# Altium PCB EGS8030带驱动.PcbDoc
Units mil, origin at the board's own origin, x right, y up, seen from the top; angles counter-clockwise.
Board outline 4085.03 x 2765.03 mil, 2 copper layers (Top Layer, Bottom Layer); 75 components, 74 nets, 270 pads, 0 vias.
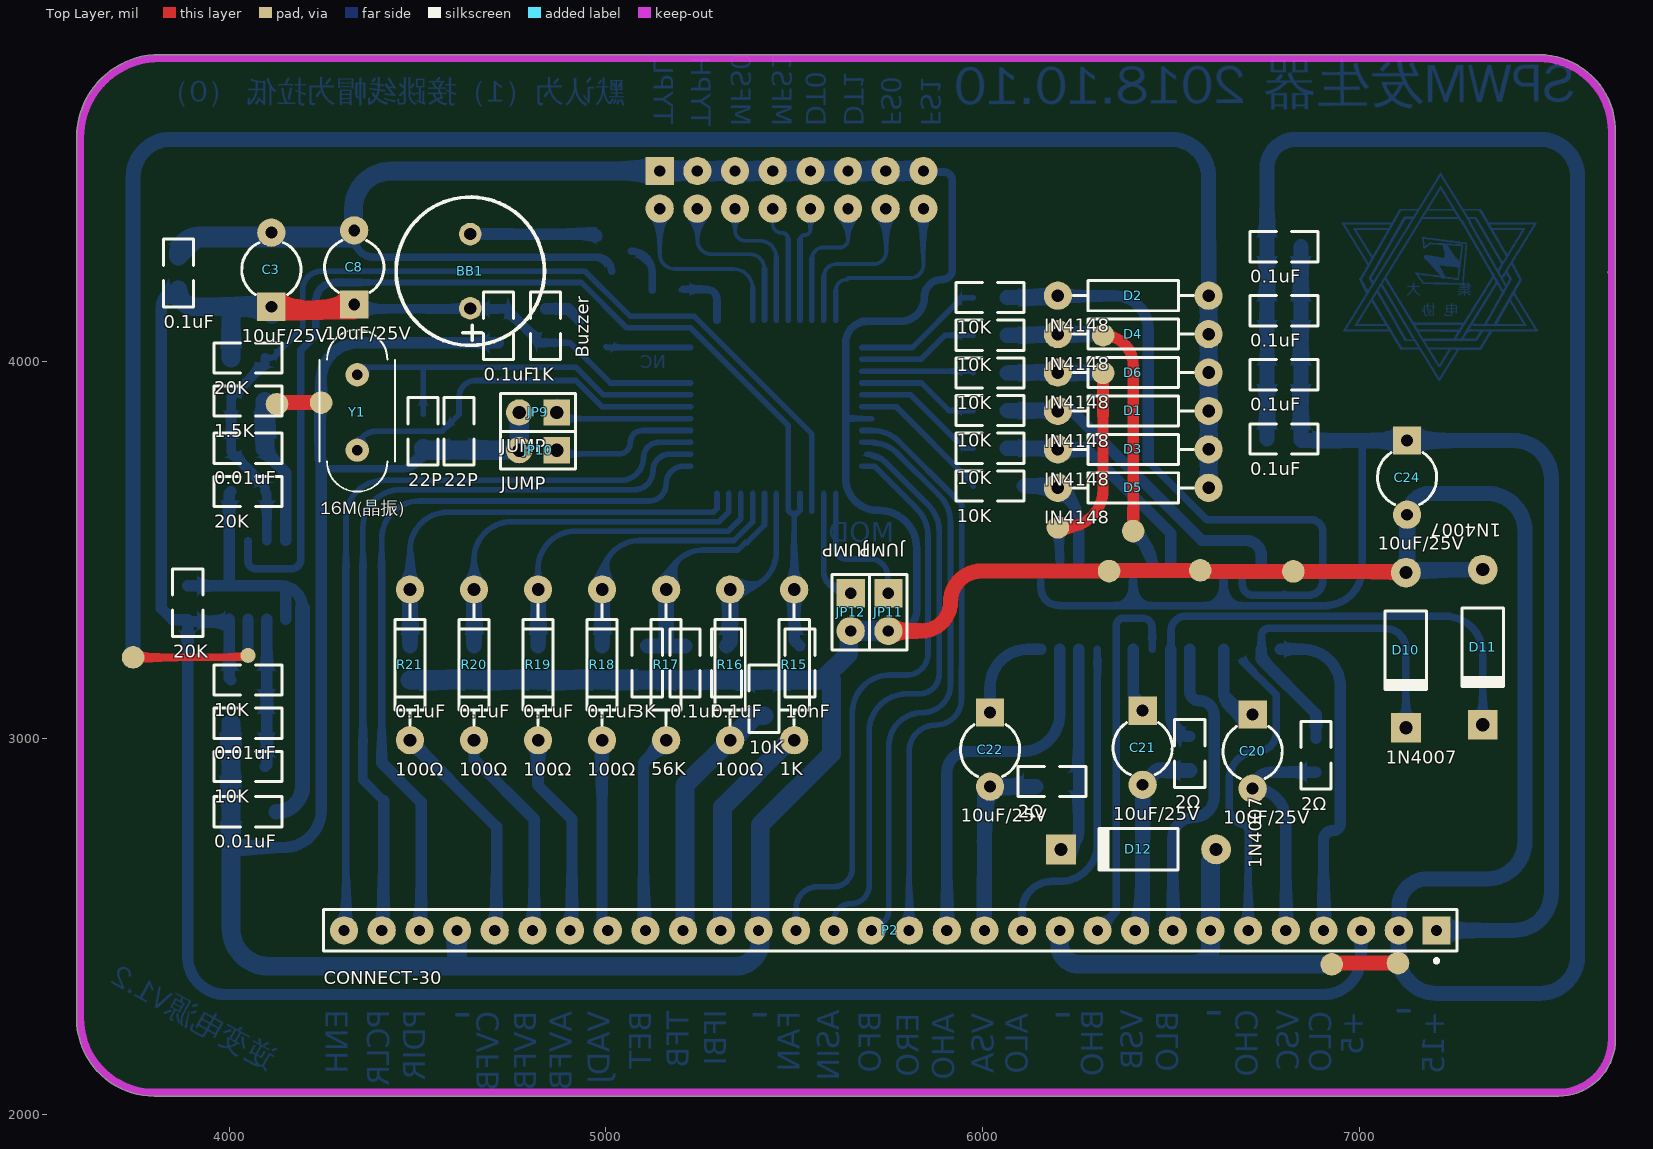
[diagram p0: Top Layer view]
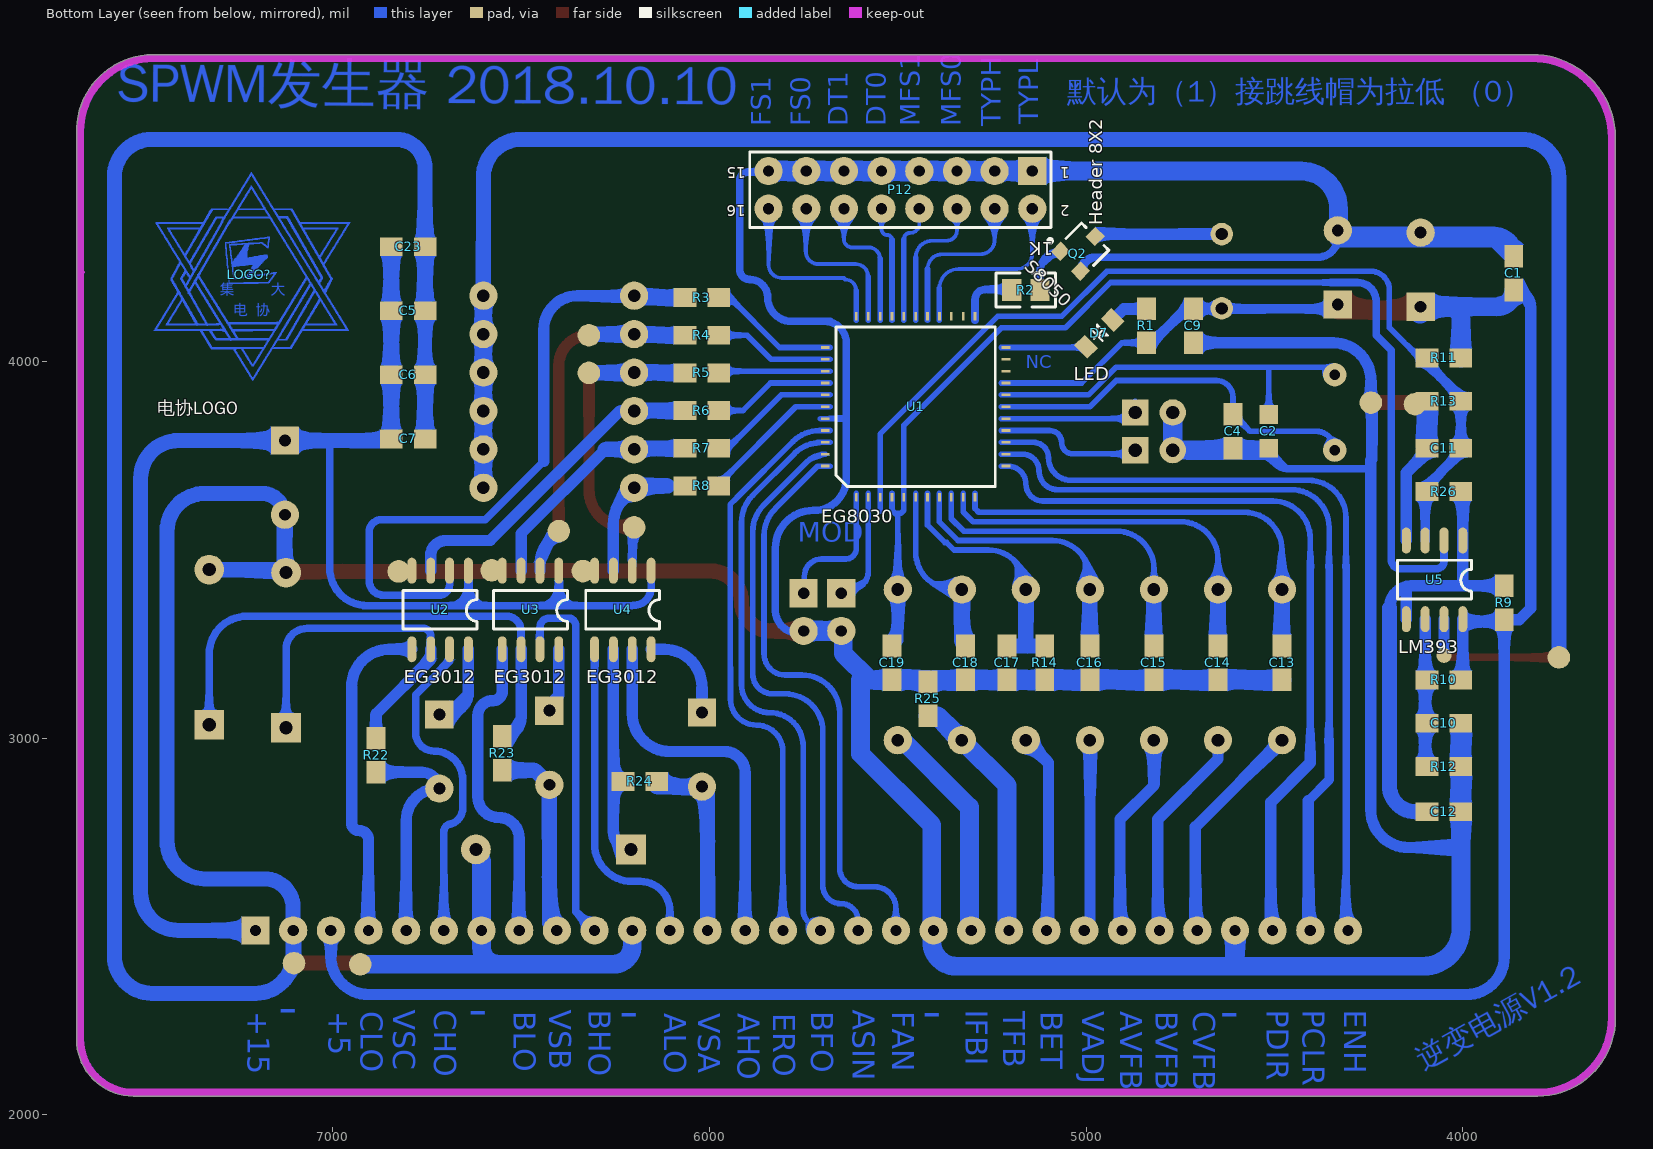
[diagram p1: Bottom Layer view, seen from below]

## Layer stack, top to bottom
Top Solder: solder mask 0.4, Solder Resist, Dk 3.5
Top Layer: signal copper 1.4
Dielectric 1: dielectric 12.6, FR-4, Dk 4.8
Bottom Layer: signal copper 1.4
Bottom Solder: solder mask 0.4, Solder Resist, Dk 3.5

## Board outline
3594.99,2256.3 3594.99,4597 cw(c3605,4597) 3595,4597.54 cw(c3815,4595) 3815,4815.02 7477,4815.02 cw(c7477,4805) 7477.59,4815 cw(c7478.11,4805) 7478.17,4815.01 cw(c7477,4612) 7679.82,4620.99 cw(c7670,4619) 7680.02,4619 7680.02,2201 cw(c7529,2201) 7529,2049.99 3801.3,2049.99 cw(c3801.3,2256.3)

## Design rules (kind name [scope] priority, off if disabled: settings)
Clearance [All] p1: gap=8
ComponentClearance [All] p1: gap=0 collisioncheckmode=3 verticalgap=0 showdistances=FALSE
PolygonConnect [All] p1: connectstyle=Relief reliefconductorwidth=10 reliefentries=4 polygonreliefangle="90 Angle" airgapwidth=10
RoutingVias [All] p1: holewidth=28 width=50 viastyle="Through Hole" minholewidth=28 minwidth=50 maxholewidth=28 maxwidth=50
SolderMaskExpansion [All] p1: expansion=4
Width [All] p1: maxlimit=60 minlimit=10 preferedwidth=10 toplayer_maxwidth=50 minimp=50.000000 maximp=50.000000 favimp=50.000000
29 further rules are at their usual default settings.

## Components (designator, comment, footprint, x,y, rotation, side; value= is the part's Value field where it differs from the comment)
BB1 "Buzzer" Buzzer 4640,4240 r90 top
C1 "0.1uF" 0805#1 3860,4220 r270 top
C2 "22P" 0805#2 4510,3800 r270 top
C3 "10uF/25V" CAPR5-4X5 4112,4244 r90 top
C4 "22P" 0805#1 4605,3800 r270 top
C5 "0.1uF" 0805#1 6815,4130 r0 top
C6 "0.1uF" 0805#1 6815,3960 r0 top
C7 "0.1uF" 0805#1 6815,3790 r0 top
C8 "10uF/25V" CAPR5-4X5 4332,4250 r90 top
C9 "0.1uF" 0805#1 4720,4110 r90 top
C10 "0.01uF" 0805#1 4065,3035 r0 top
C11 "0.01uF" 0805#1 4035,3775 r180 top
C12 "0.01uF" 0805#1 4065,2800 r0 top
C13 "0.1uF" 0805#1 4485,3215 r90 top
C14 "0.1uF" 0805#1 4655,3215 r90 top
C15 "0.1uF" 0805#1 4825,3215 r90 top
C16 "0.1uF" 0805#1 4995,3215 r90 top
C17 "0.1uF" 0805#1 5215,3215 r90 top
C18 "0.1uF" 0805#1 5325,3215 r90 top
C19 "10nF" 0805#1 5520,3215 r90 top
C20 "10uF/25V" CAPR5-4X5 6717,2965 r270 top
C21 "10uF/25V" CAPR5-4X5 6425,2975 r270 top
C22 "10uF/25V" CAPR5-4X5 6020,2970 r270 top
C23 "0.1uF" 0805#1 6815,4300 r0 top
C24 "10uF/25V" CAPR5-4X5 7127,3692 r270 top
D1 "IN4148" AXIAL-0.4 6400,3869 r0 top
D2 "IN4148" AXIAL-0.4 6400,4175 r0 top
D3 "IN4148" AXIAL-0.4 6400,3767 r0 top
D4 "IN4148" AXIAL-0.4 6400,4073 r0 top
D5 "IN4148" AXIAL-0.4 6400,3665 r0 top
D6 "IN4148" AXIAL-0.4 6400,3971 r0 top
D7 "LED" LED(0805) 4965,4075 r315 bottom
D10 "1N4007" DO-41 7124,3234 r270 top
D11 "1N4007" DO-41 7328,3242 r270 top
D12 "1N4007" DO-41 6414,2705 r180 top
JP9 "JUMP" HDR1X2#1 4870,3865 r180 top
JP10 "JUMP" HDR1X2#1 4870,3765 r180 top
JP11 "JUMP" HDR1X2#2 5750,3385 r270 top
JP12 "JUMP" HDR1X2#2 5650,3385 r270 top
LOGO? "电协LOGO" 电协LOGO 7222,4230.94 r180 bottom
P2 "CONNECT-30" HDR1X30 7205,2490 r180 top
P12 "Header 8X2" HDR2X8 5143,4506 r0 bottom
Q2 "S8050" NPN 5015,4240 r225 bottom
R1 "1K" 0805#1 4845,4110 r90 top
R2 "1K" 0805#3 5160,4190 r0 bottom
R3 "10K" 0805#1 6035,4165 r0 top
R4 "10K" 0805#1 6035,4065 r0 top
R5 "10K" 0805#1 6035,3965 r0 top
R6 "10K" 0805#1 6035,3865 r0 top
R7 "10K" 0805#1 6035,3765 r0 top
R8 "10K" 0805#1 6035,3665 r0 top
R9 "20K" 0805#1 3895,3375 r90 top
R10 "10K" 0805#1 4065,3150 r0 top
R11 "20K" 0805#1 4065,4005 r0 top
R12 "10K" 0805#1 4035,2930 r180 top
R13 "1.5K" 0805#1 4065,3890 r0 top
R14 "3K" 0805#1 5105,3185 r270 top
R15 "1K" AXIAL-0.4 5500,3195 r270 top
R16 "100Ω" AXIAL-0.4 5330,3195 r270 top
R17 "56K" AXIAL-0.4 5160,3195 r270 top
R18 "100Ω" AXIAL-0.4 4990,3195 r270 top
R19 "100Ω" AXIAL-0.4 4820,3195 r270 top
R20 "100Ω" AXIAL-0.4 4650,3195 r270 top
R21 "100Ω" AXIAL-0.4 4480,3195 r270 top
R22 "2Ω" 0805#1 6890,2970 r90 top
R23 "2Ω" 0805#1 6555,2975 r90 top
R24 "2Ω" 0805#1 6199.5,2880.48 r0 top
R25 "10K" 0805#1 5415,3090 r270 top
R26 "20K" 0805#1 4065,3650 r0 top
U1 "EG8030" EG8030 5554.96,3965 r180 bottom locked
U2 "EG3012" SOIC-8(TPS7333/50) 6615,3480 r270 bottom
U3 "EG3012" SOIC-8(TPS7333/50) 6375,3480 r270 bottom
U4 "EG3012" SOIC-8(TPS7333/50) 6130,3480 r270 bottom
U5 "LM393" SOIC-8(TPS7333/50) 3975,3560 r270 bottom
Y1 "16M(晶振)" 22M(晶振) 4340,3765 r90 top

## Footprints (in the part's own frame and the unit in brackets; to place one, negate y for a bottom-side part, rotate by r counter-clockwise, add the part's x,y. Pads: shape width x height; smd on the part's side, far side on the other; paste and mask are expansions set on the pad)
22M(晶振) [mil]
  round 62 hole 28: 1(0,0) 2(200,0)
  silkscreen extent -110,-100 320,100, body extent -114,-102 326,82, height 143
0805#1 [mil]
  rect 60x50 smd far side: 1(-60,5) 2(30,5)
  silkscreen extent -105,-35 75,45
0805#2 [mil]
  rect 50x50 smd far side: 1(-60,5) 2(30,5)
  silkscreen extent -105,-35 75,45
0805#3 [mil]
  rect 51.18x59.06 smd: 1(-37.4,0) 2(37.4,0)
  silkscreen extent -79,-45 79,45, body extent -39,-25 39,25, height 22
AXIAL-0.4 [mm] "Axial Device, Thru-Hole; 2 Leads; 0.4 in Pin Spacing"
  round 1.905 hole 0.85: 1(-5.08,0) 2(5.08,0)
  silkscreen extent -4.06,-1.02 4.06,1.02
Buzzer [mil]
  round 60 hole 32 mask+0: 1(-98.43,0) 2(98.43,0)
  silkscreen extent -197,-197 197,197, body extent -240,-236 233,236, height 354
CAPR5-4X5 [mm] "Capacitor; 2 Leads"
  rect 1.905x1.905 hole 0.8: 1(-2.5,0)
  round 1.905 hole 0.8: 2(2.5,0)
  silkscreen extent -1.69,-2 1.82,2
DO-41 [mm] "Diode, Axial; Body 5.2 x 2.7 mm (LxDia. max), Lead Dia. 0.86 mm (max)"
  round 2 hole 0.889: 1(-5.23,0)
  rect 2x2 hole 0.889: 2(5.23,0)
  silkscreen extent -2.65,-1.4 2.75,1.4
EG8030 [mm]
  oval 0.18x0.6 smd: 1(-1.397,-8.255)
  rect 0.18x0.6 smd: 2(-0.597,-8.255) 3(0.203,-8.255) 4(1.003,-8.255) 5(1.803,-8.255) 6(2.603,-8.255) 7(3.403,-8.255) 8(4.203,-8.255) 9(5.003,-8.255) 10(5.803,-8.255) 11(6.603,-8.255) 23(6.603,3.945) 24(5.803,3.945) 25(5.003,3.945) 26(4.203,3.945) 27(3.403,3.945) 28(2.603,3.945) 29(1.803,3.945) 30(1.003,3.945) 31(0.203,3.945) 32(-0.597,3.945) 33(-1.397,3.945)
  rect 0.6x0.18 smd: 12(8.703,-6.155) 13(8.703,-5.355) 14(8.703,-4.555) 15(8.703,-3.755) 16(8.703,-2.955) 17(8.703,-2.155) 18(8.703,-1.355) 19(8.703,-0.555) 20(8.703,0.245) 21(8.703,1.045) 22(8.703,1.845) 34(-3.497,1.845) 35(-3.497,1.045) 36(-3.497,0.245) 37(-3.497,-0.555) 38(-3.497,-1.355) 39(-3.497,-2.155) 40(-3.497,-2.955) 41(-3.497,-3.755) 42(-3.497,-4.555) 43(-3.497,-5.355) 44(-3.497,-6.155)
  silkscreen extent -2.76,-7.52 7.97,3.21
HDR1X2#1 [mil] "Connector; Header; 2 Position"
  rect 70x70 hole 35.43: 1(0,0)
  round 70 hole 35.43: 2(100,0)
  silkscreen extent -50,-50 150,50
HDR1X2#2 [mil] "Connector; Header; 2 Position"
  rect 75x75 hole 30: 1(0,0)
  round 75 hole 30: 2(100,0)
  silkscreen extent -50,-50 150,50
HDR1X30 [mil] "Connector; Header; 30 Position"
  rect 75x75 hole 30: 1(0,0)
  round 75 hole 30: 2(100,0) 3(200,0) 4(300,0) 5(400,0) 6(500,0) 7(600,0) 8(700,0) 9(800,0) 10(900,0) 11(1000,0) 12(1100,0) 13(1200,0) 14(1300,0) 15(1400,0) 16(1500,0) 17(1600,0) 18(1700,0) 19(1800,0) 20(1900,0) 21(2000,0) 22(2100,0) 23(2200,0) 24(2300,0) 25(2400,0) 26(2500,0) 27(2600,0) 28(2700,0) 29(2800,0) 30(2900,0)
  silkscreen extent -55,-55 2955,86
HDR2X8 [mil] "Connector; Header; 8x2 Position"
  rect 75x75 hole 30: 1(0,0)
  round 75 hole 30: 2(0,100) 3(100,0) 4(100,100) 5(200,0) 6(200,100) 7(300,0) 8(300,100) 9(400,0) 10(400,100) 11(500,0) 12(500,100) 13(600,0) 14(600,100) 15(700,0) 16(700,100)
  silkscreen extent -50,-50 750,150
LED(0805) [mil]
  rect 40x50 smd: 1(-50,0) 2(50,0)
  silkscreen extent -20,-20 20,20, body extent -37,-24 43,25, height 43
NPN [mm]
  rect 0.9x0.95 smd: 1(-0.001,0.001) 2(-1.901,0.001) 3(-0.951,2.351)
  silkscreen extent -3.03,-0.12 0.35,2.35, body extent -2.47,-0.21 0.43,2.59, height 1.2
SOIC-8(TPS7333/50) [mm]
  oval 1.75x0.6 smd: 1(0.889,-0.635) 2(0.889,-1.905) 3(0.889,-3.175) 4(0.889,-4.445) 5(6.189,-4.445) 6(6.189,-3.175) 7(6.189,-1.905) 8(6.189,-0.635)
  silkscreen extent 2.22,-5.04 4.83,-0.05
电协LOGO [mil]
  Top Layer drawing of 5309 lines, arcs and shapes, not listed

## Part data
BB1: library part Buzzer(有源蜂鸣器)
C1 C2 C4 C5 C6 C7 C9 C10 C11 C12 C13 C14 C15 C16 C17 C18 C19 C23: library part CAP, "Capacitor"
C3 C8 C20 C21 C22 C24: library part ELECTRO1, "Electrolytic Capacitor"
D1 D2 D3 D4 D5 D6: library part DIODE
D7: library part LED0, "Typical INFRARED GaAs LED"
D10 D11 D12: library part "Diode 1N4007", "1 Amp General Purpose Rectifier"
P12: "Header, 8-Pin, Dual row"
Q2: library part Q2
R1 R2 R3 R4 R5 R6 R7 R8 R9 R10 R11 R12 R13 R14 R15 R16 R17 R18 R19 R20 R21 R22 R23 R24 R25 R26: library part RES2
U1: library part EG8030_1, "3-PH SPWM"
Y1: library part XTAL

## Free pads (board coordinates)
  round 60 all layers, no hole: 2(4127,3887) 2(4244,3891) 2(6200,3560) 3(6336,3444) 3(6400,3550) 3(6578,3446) 3(6825,3443) 3(6927,2400) 3(7103,2403) 4(6320,4070) 5(6320,3970) 6(3745,3215)
  round 40 all layers, no hole: 7(4050,3220)

## Nets (pads, with @x,y where several pads share a name; then routed paths per layer and width w, separated by ;. In a path a pad name is that pad's centre, name@x,y a point inside that pad or via, vN(x,y) a via of type N, cw(c..) or ccw(c..) an arc to the next point about the centre after c; other vN are vias at no path point)
+5V: BB1.1 C1.2 C3.1 C8.1 C9.2 P2.3 R1.1 R9.1 R10.1 R11.1 U1.19 U5.8 | length 7007.5
  Top Layer w50: C3.1 ccw(c4121,4145.57) 4121,4136.57 C8.1@4330,4136.57
  Bottom Layer w15: R1.1 4905,4050 5011.85,3943.15 5225,3943.15
  Bottom Layer w25: C8.1@4330,4136.57 4333.43,4140 C9.2 4735,4140 4825,4050 R1.1
  Bottom Layer w30: C1.2 ccw(c3865,4145) 3820,4145 3820,3345 3850,3315 R9.1 3890,2420 ccw(c3990,2420) 3990,2320 6905,2320 ccw(c6905,2420) 7005,2420 P2.3 ; R9.1@3905,3310 3993.66,3310 U5.8 4000,3160 R10.1 ; 4005,4111.57 4020,4126.57
  Bottom Layer w50: C1.2 ccw(c3909.43,4190) 3909.43,4145.57 C3.1 ; R11.1 4005,4111.57 ; C3.1@4112,4126.57 C3.1@4115,4126.57
+15V: C5.2 C6.2 C7.2 C23.2 C24.1 P2.1 U2.1 U3.1 U4.1 | length 4196.1
  Bottom Layer w20: U4.1 6155,3399.43 ccw(c6201.64,3399.43) 6173.33,3362.36 ccw(c6201.64,3399.43) 6190.98,3354.02 ccw(c6201.64,3399.43) 6201.64,3352.79 ccw(c6211,3408) 6211,3352 6400,3352 ; U3.1 6400,3352 ; 6640,3365 U2.1 ; 7017,3790.43 ccw(c7017,3781.43) 7008,3781.43 7008,3452 cw(c6908,3452) 6908,3352 6400,3352
  Bottom Layer w40: C23.2 C5.2 C6.2 C7.2 ccw(c6849.57,3795) 6849.57,3790.43 7017,3790.43 C24.1 7410,3790.43 cw(c7410,3690.43) 7510,3690.43 7510,2590 cw(c7410,2590) 7410,2490 P2.1
AHO: P2.14 U4.7 | length 979.4
  Bottom Layer w30: P2.14 5905,2909 cw(c5961,2909) 5961,2965 6105,2965 ccw(c6105,3065) 6205,3065 U4.7
ALO: P2.12 U4.5 | length 869.5
  Bottom Layer w20: P2.12@6105,2513 6105,2541 cw(c6184,2541) 6184,2620 6205,2620 ccw(c6205,2720) 6305,2720 U4.5
  Bottom Layer w30: P2.12 P2.12@6105,2513
ASIN: P2.17 U1.43 | length 1527.1
  Bottom Layer w15: P2.17 5605,2515 cw(c5651,2515) 5651,2561 ccw(c5651,2609) 5699,2609 5699,3018 cw(c5799,3018) 5711.61,3066.61 cw(c5799,3018) 5750.39,3105.39 cw(c5799,3018) 5799,3118 5832,3118 ccw(c5832,3171) 5885,3171 5885,3548.58 ccw(c5785,3548.58) 5855.71,3619.29 5740.76,3734.24 ccw(c5692.64,3686.12) U1.43
AVFB: P2.24 R19.2 | length 543.6
  Bottom Layer w30: R19.2 4820,2875 4910,2785 4910,2502.07 cw(c4892.93,2502.07) P2.24
BET: P2.22 R17.2 | length 535.3
  Bottom Layer w30: P2.22 ccw(c5092.93,2502.07) 5110,2502.07 5100,2512.07 5100,2935 R17.2
BFO: P2.16 U1.42 | length 1540.4
  Bottom Layer w15: 5680,3785.67 5702.91,3785.67 cw(c5702.91,3685.67) 5773.62,3756.38 5885.71,3644.29 cw(c5815,3573.58) 5915,3573.58 5915,3143 cw(c5840,3143) 5880.69,3080 cw(c5840,3143) 5840,3068 ccw(c5840,2979) 5751,2979 5751,2543.07 cw(c5710,2543.07) 5710,2502.07 cw(c5692.93,2502.07) P2.16
BHO: P2.10 U3.7 | length 1008.1
  Bottom Layer w20: P2.10 6355,2540 6355,3299 cw(c6375,3299) 6375,3319 6425,3319 cw(c6425,3294) 6450,3294 U3.7
BLO: P2.8 U3.5 | length 846.2
  Bottom Layer w30: P2.8 6505,2735 cw(c6560,2735) 6560,2790 ccw(c6560,2845) 6615,2845 6615,3060 ccw(c6575,3060) 6575,3100 cw(c6575,3125) 6550,3125 U3.5
BVFB: P2.25 R20.2 | length 572.6
  Bottom Layer w30: R20.2 4650,2945 4810,2785 4810,2502.07 cw(c4792.93,2502.07) P2.25
CHO: P2.6 U2.7 | length 858.4
  Bottom Layer w20: U2.7@6690,3205 6780,3115 6780,3015 cw(c6731,3015) 6731,2966 ccw(c6731,2890) 6655,2890 6655,2815 ccw(c6699.5,2815) 6683.64,2773.42 ; P2.6 6705,2752.06 ccw(c6683.64,2752.06) 6693.76,2770.87 ; 6683.64,2773.42 cw(c6683.64,2752.06) 6693.76,2770.87 ; 6683.64,2773.42 ccw(c6699.5,2815) 6693.76,2770.87
CLO: P2.4 U2.5 | length 889.1
  Bottom Layer w30: U2.5 6850,3236.34 cw(c6850,3136.34) 6950,3136.34 6950,2775 cw(c6930,2775) 6930,2755 ccw(c6930,2730) 6905,2730 P2.4
CVFB: P2.26 R21.2 | length 601.6
  Bottom Layer w30: R21.2 4710,2765 4710,2502.07 cw(c4692.93,2502.07) P2.26
ENH: P2.30 U1.14 | length 2125.9
  Bottom Layer w15: 4310,3450 4310,3585 cw(c4410,3585) 4410,3685 5040,3685 ccw(c5040,3745) 5100,3745 cw(c5140.67,3745) 5140.67,3785.67 U1.14 5225,3785.67
  Bottom Layer w20: P2.30 ccw(c4292.93,2502.07) 4310,2502.07 4310,3450
ERO: P2.15 U1.41 | length 1552.5
  Bottom Layer w15: 5680,3817.17 5707.62,3817.17 cw(c5707.62,3717.17) 5778.33,3787.88 5927.5,3638.71 5927.5,3637.75 5945,3620.25 5945,3198.28 cw(c5876.72,3198.28) 5944.06,3186.99 5944.06,3104.06 cw(c5875,3104.06) 5875,3035 ccw(c5875,2965) 5805,2965 P2.15
FAN: P2.18 U1.44 | length 1557.2
  Bottom Layer w15: P2.18 5505,2549 cw(c5562,2549) 5562,2606 5605,2606 ccw(c5605,2655.29) 5654.29,2655.29 5654.29,3068 cw(c5754.29,3068) 5754.29,3168 5799,3168 ccw(c5799,3224) 5855,3224 5855,3538.58 ccw(c5755,3538.58) 5825.71,3609.29 5712.32,3722.68 5680,3722.68
GND: C1.1 C2.2 C3.2 C4.2 C5.1 C6.1 C7.1 C8.2 C9.1 C10.1 C11.1 C12.1 C13.1 C14.1 C15.1 C16.1 C17.1 C18.1 C19.1 C23.1 C24.2 D10.1 D11.1 D12.1 JP9.2 JP10.2 JP11.2 JP12.2 P2.2 P2.7 P2.11 P2.19 P2.27 P12.1 P12.3 P12.5 P12.7 P12.9 P12.11 P12.13 P12.15 pad.2@4127,3887 pad.2@4244,3891 pad.3@6336,3444 pad.3@6578,3446 pad.3@6825,3443 pad.3@6927,2400 pad.3@7103,2403 Q2.1 R12.2 R13.2 R14.2 R25.1 U1.40 U2.4 U3.4 U4.4 U5.4 | length 21741.6
  Top Layer w40: pad.2@4127,3887 cw(c4131,3887) 4131,3891 pad.2@4244,3891 ; JP11.2 5838,3285 ccw(c5838,3362) 5915,3362 cw(c5997,3362) 5997,3444 6336,3444 cw(c6338,3444) 6338,3446 6578,3446 ccw(c6581,3446) 6581,3443 6825,3443 7120.91,3443 cw(c7120.91,3439.91) D10.1 ; pad.3@6927,2400 cw(c6930,2400) 6930,2403 pad.3@7103,2403
  Bottom Layer w10: 4244.48,3714.18 cw(c4247.26,3709.92) 4247.26,3715
  Bottom Layer w15: 5636.66,3848.66 5705,3848.66 ; P12.15 P12.15@5858,4506
  Bottom Layer w20: 4247.26,3715 4460,3715 ccw(c4460,3770) C2.2 ; C8.2@4330,4333.43 ccw(c4386.43,4333.43) 4330.22,4328.43 ccw(c4386.43,4333.43) 4386.43,4277 4978.07,4277 cw(c4978.07,4240.06) Q2.1 ; 5680,4107 5782,4107 ccw(c5782,4170.3) 5845.3,4170.3 cw(c5893,4170.3) 5893,4218 ccw(c5893,4245) 5920,4245 5920,4481.12 ccw(c5897.69,4481.12) 5897.69,4503.43 5860.57,4503.43 cw(c5860.57,4506) P12.15@5858,4506 ; 5694,4107 ccw(c5694,4049.66) 5636.66,4049.66 5636.66,3848.66 5636.66,3690 ccw(c5721.66,3690) 5721.66,3605 5725,3605 cw(c5725,3505) 5825,3505 5825,3340 ; JP11.2@5768.38,3280.1 ccw(c5765,3340) 5824.9,3336.62 ; JP11.2@5768.38,3280.1 cw(c5765,3340) 5765,3280 5768.28,3280 JP11.2@5768.38,3280.1 ; 5824.9,3336.62 ccw(c5765,3340) 5825,3340 ; 5824.9,3336.62 5825,3336.72 5825,3340
  Bottom Layer w30: 4005,2710 4144.48,2710 ccw(c4144.48,2810) 4244.48,2810 4244.48,3714.18 4244.48,3737.31 ccw(c4241.87,3737.31) 4241.87,3739.92 pad.2@4240.34,3890.96 ; C11.1 4095,3760 4150,3705 U5.4 ; pad.2@4244,3891 4244,3950 cw(c4344,3950) 4344,4050 C9.1
  Bottom Layer w35: C6.1 C5.1
  Bottom Layer w40: C7.1 C6.1 ; C5.1 C23.1 6755,4512.82 cw(c6832.18,4512.82) 6832.18,4590 7480,4590 cw(c7480,4490) 7580,4490 7580,2423 cw(c7480,2423) 7480,2323 7205,2323 cw(c7205,2423) 7105,2423 P2.2 7105,2550 cw(c7182,2550) 7182,2627 7340,2627 ccw(c7340,2727) 7440,2727 7440,3550 ccw(c7340,3550) 7340,3650 7188,3650 ccw(c7188,3591) 7129,3591 7129,3446 cw(c7130.91,3446) 7130.91,3447.91 D11.1
  Bottom Layer w50: C10.1 R12.2 C12.1 4005,2710 4005,2495 ccw(c4105,2495) 4105,2395 5344.24,2395 ccw(c5344.24,2460.76) 5410,2460.76 5410,2770 5599,2959 5599,3155 C19.1 C18.1 C17.1 R14.2 C16.1 C15.1 C14.1 C13.1 ; C11.1 R13.2 ; C8.2@4330,4328.43 3913.43,4328.43 C1.1 cw(c3918.43,4280) 3918.43,4333.43 4330,4333.43 4330,4406 cw(c4430,4406) 4430,4506 P12.1 P12.3 P12.5 P12.7 P12.9 P12.11 P12.13 P12.15 ; C2.2 ccw(c4520,3770) 4520,3765 JP10.2 JP9.2 ; 4605,2400 P2.27 ; P2.19 ccw(c5392.93,2502.07) P2.19@5410,2502.07 ; 5575,3155 5645,3225 5645,3285 JP12.2 JP11.2 ; P2.11 6205,2450 ccw(c6255,2450) 6255,2400 6560,2400 ; D12.1@6632.5,2697.5 ccw(c6632.5,2670) 6605,2670 P2.7 6605,2445 cw(c6560,2445) 6560,2400 ; pad.3@6930,2403 cw(c6927,2403) 6927,2400 6560,2400
IFBI: P2.20 R15.2 | length 592.4
  Bottom Layer w50: P2.20 ccw(c5292.93,2502.07) 5310,2502.07 5310,2817.53 5487.47,2995 R15.2
NetBB1_2: BB1.2 Q2.3 | length 339.7
  Bottom Layer w30: BB1.2 4969.54,4338.43 cw(c4969.54,4331.92) Q2.3
NetC2_1: C2.1 U1.18 Y1.2 | length 1043.4
  Bottom Layer w15: Y1.2@4361.17,3980 ccw(c4361.17,3939.81) 4347.38,3977.56 cw(c4375,3930) 4375,3985 4920.36,3985 4993.7,3911.65 5225,3911.65 ; C2.1 4515,3980
NetC4_1: C4.1 U1.17 Y1.1 | length 1031.8
  Bottom Layer w15: Y1.1 cw(c4390,3765) 4390,3815 4440,3815 4565,3815 C4.1 4610,3905 cw(c4655,3905) 4655,3950 4920,3950 4989.84,3880.16 5225,3880.16
NetC10_2: C10.2 R10.2 R12.1 U5.6 | length 393.4
  Bottom Layer w30: R12.1 4100,2930 U5.6
NetC11_2: C11.2 R11.2 R13.1 R26.2 U1.3 U5.3 | length 2559.2
  Bottom Layer w15: R11.2 4115,4010 4195,4090 4195,4190 cw(c4245,4190) 4245,4240 4945,4240 5065,4120 5235,4120 5546.97,3808.03 U1.3 5546.97,3603.03
  Bottom Layer w25: R11.2 4095,3995 4005,3905 R13.1 C11.2 4005,3760 4095,3670 R26.2 4100,3650 U5.3
NetC12_2: C12.2 R9.2 R26.1 U5.1 U5.5 | length 1270.5
  Bottom Layer w30: R9.2 3995,3405 ; R26.1 4000,3650 U5.1 4000,3410 3995,3405 ; U5.5 4150,3390.36 ccw(c4135.36,3390.36) 4135.36,3405 ; 4195,3345.36 ccw(c4135.36,3345.36) 4162.78,3398.32 ccw(c4135.36,3345.36) 4135.36,3405 ; 3995,3405 4135.36,3405
  Bottom Layer w40: 4125,2805 ccw(c4125,2875) 4195,2875 4195,3345.36
NetC13_2: C13.2 R21.1 U1.11 | length 1171.2
  Bottom Layer w15: R21.1 4480,3500 cw(c4580,3500) 4580,3600 5285,3600 5295,3610 U1.11@5295,3650
  Bottom Layer w40: C13.2 R21.1
NetC14_2: C14.2 R20.1 U1.10 | length 1023.1
  Bottom Layer w15: R20.1 4650,3410 4650,3475 cw(c4750,3475) 4750,3575 4815,3575 5300,3575 5326.5,3601.5 U1.10@5326.5,3650
  Bottom Layer w40: C14.2 R20.1
NetC15_2: C15.2 R19.1 U1.9 | length 880.7
  Bottom Layer w15: R19.1 4820,3410 4820,3450 cw(c4920,3450) 4920,3550 4960,3550 5325,3550 5357.99,3582.99 U1.9@5357.99,3650
  Bottom Layer w40: C15.2 R19.1
NetC16_2: C16.2 R18.1 U1.8 | length 732.6
  Bottom Layer w15: R18.1 4990,3410 4990,3425 cw(c5090,3425) 5090,3525 5105,3525 5340,3525 5389.49,3574.49 U1.8@5389.49,3650
  Bottom Layer w40: C16.2 R18.1
NetC17_2: C17.2 R14.1 R17.1 U1.7 | length 686.5
  Bottom Layer w15: R17.1 5160,3400 cw(c5260,3400) 5260,3500 5350.36,3500 5370.36,3520 5375,3520 5420.98,3565.98 U1.7@5420.98,3650
  Bottom Layer w40: R14.1 5155,3245 ; R17.1 5160,3250 5155,3245 ; C17.2 5155,3245
NetC18_2: C18.2 R16.1 U1.6 | length 488.7
  Bottom Layer w15: R16.1 5352.48,3395 ccw(c5352.48,3495) 5452.48,3495 5452.48,3517.48 U1.6@5452.48,3650
  Bottom Layer w40: C18.2 5330,3255 R16.1
NetC19_2: C19.2 R15.1 U1.4 U1.5 U5.2 | length 3032
  Bottom Layer w15: 4350,4210 4935,4210 5055,4090 5225,4090 5483.98,3831.02 U1.5 5483.98,3605.47 5491.85,3597.6 5507.6,3597.6 ; R15.1 5499.72,3395.28 5499.72,3589.72 5507.6,3597.6 ; U1.4@5515.47,3650 5515.47,3605.47 5507.6,3597.6
  Bottom Layer w20: U5.2 4050,3470 ccw(c4070,3470) 4070,3450 4165,3450 ccw(c4165,3475) 4190,3475 4190,4030 4230,4070 4230,4160 cw(c4280,4160) 4280,4210 4350,4210
  Bottom Layer w30: R15.1 5500,3260 C19.2
NetC20_1: C20.1 U2.8 | length 227
  Bottom Layer w30: U2.8 6640,3122 ccw(c6693.57,3122) 6693.57,3068.43 6715,3068.43 C20.1@6720,3063.43
NetC21_1: C21.1 U3.8 | length 179.5
  Bottom Layer w30: U3.8 6400,3113.43 C21.1@6440,3073.43
NetC22_1: C22.1 U4.8 | length 260
  Bottom Layer w30: C22.1 6020,3136.34 cw(c6120,3136.34) 6120,3236.34 U4.8
NetD1_1: D1.1 R6.2 U2.3 | length 880.7
  Bottom Layer w30: D1.1 6238.22,3869 6582.22,3525 6700,3525 cw(c6700,3485) 6740,3485 U2.3
  Bottom Layer w40: R6.2 6199,3870 D1.1
NetD1_2: D1.2 D2.2 D3.2 D4.2 D5.2 D6.2 pad.6 pad.7 U5.7 | length 5472.6
  Top Layer w20: pad.6 4045,3215 pad.7
  Bottom Layer w30: pad.7 U5.7
  Bottom Layer w40: pad.6 3745,4490 cw(c3845,4490) 3845,4590 6500,4590 cw(c6500,4490) 6600,4490 D2.2 D4.2 D6.2 D1.2 D3.2 D5.2
NetD2_1: D2.1 R3.2 U2.2 | length 1736.9
  Bottom Layer w20: 6440,3735 6595,3580 6872,3580 cw(c6872,3549) 6903,3549 6903,3417.37 cw(c6865.63,3417.37) 6865.63,3380 6802.7,3380 ; U2.2 6690,3408 ccw(c6718,3408) 6718,3380 6799.7,3380 cw(c6802.7,3380) 6802.7,3383
  Bottom Layer w30: D2.1 6350,4175 cw(c6350,4085) 6440,4085 6440,3735
  Bottom Layer w40: R3.2 D2.1@6195,4170
NetD3_1: D3.1 R7.2 U3.3 | length 627.4
  Bottom Layer w30: 6276.58,3767 6500,3543.58 U3.3
  Bottom Layer w40: R7.2 6197,3770 D3.1 6276.58,3767
NetD4_1: D4.1 pad.3@6400,3550 pad.4 R4.2 U3.2 | length 944.6
  Top Layer w30: pad.4 cw(c6320,3990) 6400,3990 pad.3@6400,3550
  Bottom Layer w30: pad.3@6400,3550 6420.71,3529.29 cw(c6350,3458.58) 6450,3458.58 U3.2
  Bottom Layer w40: R4.2 6197,4070 D4.1 6317,4073 pad.4
NetD5_1: D5.1 R8.2 U4.3 | length 330.5
  Bottom Layer w30: D5.1 6225.71,3639.29 cw(c6155,3568.58) 6255,3568.58 U4.3
  Bottom Layer w40: 6110,3670 6195,3670 D5.1
NetD6_1: D6.1 pad.2@6200,3560 pad.5 R5.2 U4.2 | length 860
  Top Layer w30: pad.2@6200,3560 6220,3560 ccw(c6220,3660) 6320,3660 pad.5
  Bottom Layer w20: pad.2@6200,3560 6205,3555 U4.2
  Bottom Layer w40: R5.2 6199,3970 D6.1 6319,3971 pad.5
NetD7_1: D7.1 R1.2 | length 101.9
  Bottom Layer w30: R1.2 4900,4140 D7.1
NetD7_2: D7.2 U1.22 | length 225.8
  Bottom Layer w15: D7.2 ccw(c5002.36,4039.64) 5002.36,4037.64 5225,4037.64
NetD10_2: D10.2 R22.2 U2.6 | length 967.3
  Bottom Layer w20: U2.6 6740,3272 cw(c6760,3272) 6760,3292 7068,3292 cw(c7068,3236) 7124,3236 D10.2
  Bottom Layer w30: U2.6 6740,3210 6885,3065 R22.2
NetD11_2: D11.2 R23.2 U3.6 | length 1390.9
  Bottom Layer w20: U3.6 6500,3285 cw(c6539,3285) 6539,3324 7228,3324 cw(c7228,3224) 7328,3224 D11.2@7328,3049
  Bottom Layer w30: U3.6 6500,3055 ccw(c6550,3055) R23.2
NetD12_2: D12.2 R24.2 U4.6 | length 558.1
  Bottom Layer w30: D12.2 ccw(c6208.09,2751.91) 6255,2751.91 6255,3015 U4.6
NetJP9_1: JP9.1 U1.16 | length 385.5
  Bottom Layer w15: JP9.1 ccw(c4886.34,3865) 4886.34,3848.66 5225,3848.66 ; JP9.1@4870,3895 JP9.1@4885,3880
NetJP10_1: JP10.1 U1.15 | length 394.6
  Bottom Layer w15: JP10.1 4880,3755 5035,3755 ccw(c5035,3785) 5065,3785 cw(c5097.17,3785) 5097.17,3817.17 U1.15 5225,3817.17
NetJP11_1: JP11.1 U1.1 | length 386.3
  Bottom Layer w15: U1.1@5609.96,3650 5609.96,3504.04 ccw(c5638,3504.04) 5638,3476 5702,3476 cw(c5702,3430) 5748,3430 5748,3403 cw(c5745,3403) 5745,3400 JP11.1@5765,3380
NetJP12_1: JP12.1 U1.2 | length 327.6
  Bottom Layer w15: U1.2@5578.46,3650 5578.46,3442.01 ccw(c5625.48,3442.01) 5625.48,3395 5650,3395 JP12.1@5635,3380
NetP12_2: P12.2 U1.26 | length 503.2
  Bottom Layer w10: P12.2 5143,4286 ccw(c5183,4286) 5183,4246 5338,4246 cw(c5338,4194.51) 5389.49,4194.51
  Bottom Layer w15: U1.26@5389.49,4110 5389.49,4194.51
NetP12_4: P12.4 U1.27 | length 440.9
  Bottom Layer w10: P12.4 5243,4323 ccw(c5281,4323) 5281,4285 5382,4285 cw(c5382,4246.02) 5420.98,4246.02
  Bottom Layer w15: U1.27@5420.98,4110 5420.98,4246.02
NetP12_6: P12.6 U1.28 | length 374.8
  Bottom Layer w10: P12.6 5343,4348 ccw(c5370,4348) 5370,4321 5408,4321 cw(c5408,4276.52) 5452.48,4276.52
  Bottom Layer w15: U1.28@5452.48,4110 5452.48,4276.52
NetP12_8: P12.8 U1.29 | length 319.4
  Bottom Layer w10: P12.8 5443,4365 ccw(c5466,4365) 5466,4342 cw(c5466,4324.02) 5483.98,4324.02
  Bottom Layer w15: U1.29@5483.98,4110 5483.98,4324.02
NetP12_10: P12.10 U1.30 | length 311.7
  Bottom Layer w10: 5515.47,4323.47 cw(c5528,4323.47) 5528,4336 ccw(c5528,4351) 5543,4351 P12.10
  Bottom Layer w15: U1.30@5515.47,4110 5515.47,4323.47
NetP12_12: P12.12 U1.31 | length 369.7
  Bottom Layer w10: 5546.97,4272.97 cw(c5577,4272.97) 5577,4303 5621,4303 ccw(c5621,4325) 5643,4325 P12.12
  Bottom Layer w15: U1.31@5546.97,4110 5546.97,4272.97
NetP12_14: P12.14 U1.32 | length 433.5
  Bottom Layer w10: 5578.46,4225.46 cw(c5612,4225.46) 5612,4259 5711,4259 ccw(c5711,4292) 5744,4292 5744,4405 ccw(c5743,4405) P12.14
  Bottom Layer w15: U1.32@5578.46,4110 5578.46,4225.46
NetP12_16: P12.16 U1.33 | length 499.4
  Bottom Layer w10: 5609.96,4187.96 cw(c5640,4187.96) 5640,4218 cw(c5644,4218) 5644,4222 5808,4222 ccw(c5808,4257) 5843,4257 P12.16
  Bottom Layer w15: U1.33@5609.96,4110 5609.96,4187.96
NetQ2_2: Q2.2 R2.1 | length 134.2
  Bottom Layer w20: Q2.2 cw(c5067.91,4238.26) 5122.6,4238.26 R2.1
NetR2_2: R2.2 U1.23 | length 169
  Bottom Layer w10: R2.2 cw(c5199.4,4190) 5199.4,4192 R2.2@5206,4192
  Bottom Layer w20: R2.2@5206,4192 5267.65,4192 cw(c5267.65,4191.16) 5268.49,4191.17 cw(c5268.49,4164.65) 5295,4164.65 U1.23@5295,4110
NetR3_1: R3.1 U1.34 | length 349.8
  Bottom Layer w15: 5680,4037.64 5813.64,4037.64 5946,4170 R3.1
NetR4_1: R4.1 U1.35 | length 321.5
  Bottom Layer w15: 5680,4006.14 5836.14,4006.14 5900,4070 R4.1
NetR5_1: R5.1 U1.36 | length 296.9
  Bottom Layer w15: 5680,3974.65 5970.35,3974.65 R5.1
NetR6_1: R6.1 U1.37 | length 325.3
  Bottom Layer w15: 5680,3943.15 5837.85,3943.15 5911,3870 R6.1
NetR7_1: R7.1 U1.38 | length 353.7
  Bottom Layer w15: 5680,3911.65 5809.35,3911.65 5951,3770 R7.1
NetR8_1: R8.1 U1.39 | length 384.7
  Bottom Layer w15: 5680,3880.16 5770.84,3880.16 5971.14,3679.86 R8.1
PHCLR: P2.29 U1.13 | length 2075
  Bottom Layer w15: 4355,3450 4355,3560 cw(c4455,3560) 4455,3660 5075,3660 ccw(c5075,3710) 5106.64,3671.28 ccw(c5075,3710) 5113.72,3678.36 ccw(c5075,3710) 5125,3710 cw(c5169.17,3710) 5169.17,3754.17 U1.13 5225,3754.17
  Bottom Layer w20: 4355,2985 4355,3450
  Bottom Layer w25: 4355,2985 4355,2889.47 4410,2834.47
  Bottom Layer w30: P2.29 ccw(c4392.93,2502.07) 4410,2502.07 4410,2834.47
PHDIR: P2.28 U1.12 | length 2014.8
  Bottom Layer w15: 4405,3450 4405,3530 cw(c4505,3530) 4505,3630 5115,3630 ccw(c5115,3675) 5160,3675 cw(c5207.68,3675) 5163.41,3692.69 cw(c5207.68,3675) 5189.98,3719.27 cw(c5207.68,3675) 5207.68,3722.68 U1.12 5225,3722.68
  Bottom Layer w20: 4405,2955 4405,3450
  Bottom Layer w30: 4405,2955 4405,2935 4510,2830 4510,2502.07 cw(c4492.93,2502.07) P2.28
TFB: P2.21 R16.2 R25.2 | length 673
  Bottom Layer w50: P2.21 ccw(c5192.93,2502.07) 5210,2502.07 5210,2875 R16.2 5395,3060 R25.2
VADJ: P2.23 R18.2 | length 509
  Bottom Layer w30: R18.2 4990,2526.21 ccw(c5041.21,2526.21) P2.23
VSA: C22.2 P2.13 R24.1 | length 511.7
  Bottom Layer w40: P2.13 6005,2856.57 cw(c6020,2856.57) C22.2 R24.1@6141.57,2871.57
VSB: C21.2 P2.9 R23.1 | length 535.8
  Bottom Layer w40: P2.9 6425,2510 C21.2 6463.43,2915 R23.1
VSC: C20.2 P2.5 R22.1 | length 614.9
  Bottom Layer w30: P2.5 6805,2781.57 ccw(c6720,2781.57) 6720,2866.57 cw(c6763.43,2866.57) 6763.43,2910 R22.1
pads on no net: U1.20 U1.21 U1.24 U1.25

## Keep-outs
Keep-Out Layer:
  lines w10: 7662.93,4237.07 cw(c7645.86,4220) 7670,4220
  lines w20: 3605,2620 3605,4597 ; 3605,2628 3605,2256.3 ccw(c3801.3,2256.3) 3801.3,2060 7529,2060 ccw(c7529,2201) 7670,2201 7670,2805 7670,4619 ; 3605,4595 cw(c3815,4595) 3815,4805 7477,4805 ; 7478.11,4805 cw(c7477,4612) 7670,4610.89

## Other copper
Bottom Layer:
  text "默认为（1）接跳线帽为拉低 （0）" at 5050,4670 h100
  text "SPWM发生器 2018.10.10" at 7575,4655 h180 r0.27
  text "TYPL" at 5110,4630 h90 r270
  text "TYPH" at 5210,4625 h90 r270
  text "MFS0" at 5315,4625 h90 r270
  text "MFS1" at 5425,4625 h90 r270
  text "DT0" at 5515,4625 h90 r270
  text "DT1" at 5615,4625 h90 r270
  text "FS0" at 5715,4625 h90 r270
  text "FS1" at 5820,4625 h90 r270
  text "NC" at 5160,3970 h59.06
  text "MOD" at 5765,3505 h90
  text "ENH" at 4335,2280 h100 r90
  text "PCLR" at 4445,2280 h100 r90
  text "PDIR" at 4540,2280 h100 r90
  text "IFBI" at 5340,2280 h100 r90
  text "ASIN" at 5640,2280 h100 r90
  text "BHO" at 6340,2280 h100 r90
  text "VSB" at 6445,2280 h100 r90
  text "CHO" at 6750,2280 h100 r90
  text "VSC" at 6860,2280 h100 r90
  text "CVFB" at 4735,2275 h100 r90
  text "BVFB" at 4835,2275 h100 r90
  text "AVFB" at 4930,2275 h100 r90
  text "VADJ" at 5030,2275 h100 r90
  text "BET" at 5140,2275 h100 r90
  text "TFB" at 5240,2275 h100 r90
  text "FAN" at 5535,2275 h100 r90
  text "BFO" at 5750,2275 h100 r90
  text "BLO" at 6540,2275 h100 r90
  text "CLO" at 6945,2275 h100 r90
  text "+5" at 7030,2275 h100 r90
  text "+15" at 7245,2275 h100 r90
  text "ERO" at 5850,2270 h100 r90
  text "AHO" at 5945,2270 h100 r90
  text "VSA" at 6050,2270 h100 r90
  text "ALO" at 6140,2270 h100 r90
  text "-" at 7145,2205 h180
  text "-" at 6640,2200 h180
  text "-" at 4645,2195 h180
  text "-" at 5435,2195 h180
  text "-" at 6240,2195 h180
  text "逆变电源V1.2" at 4095,2100 h100 r330.85

## Text inside footprints (layer, text, board x,y; h text height)
LOGO?: Bottom Layer "大" at 7164.78,4167.27 h50; Bottom Layer "集" at 7299.78,4167.27 h50; Bottom Layer "电" at 7264.78,4112.27 h50; Bottom Layer "协" at 7204.78,4112.27 h50; Bottom Solder "协" at 7204.78,4112.27 h50; Bottom Solder "电" at 7264.78,4112.27 h50; Bottom Solder "集" at 7299.78,4167.27 h50; Bottom Solder "大" at 7164.78,4167.27 h50
P12: Bottom Overlay "16" at 5903,4426 h50 r180; Bottom Overlay "15" at 5903,4526 h50 r180; Bottom Overlay "1" at 5043,4526 h50 r180; Bottom Overlay "2" at 5043,4426 h50 r180